# Altium PCB AX301_AX4010.PcbDoc (part 6 of 10)
Units mm, origin at the board's own origin, x right, y up, seen from the top; angles counter-clockwise.
Board outline 131.7 x 91.8 mm, 4 copper layers (Top Layer, GND, Mid-Layer 1, Bottom Layer); 191 components, 338 nets, 1108 pads, 420 vias.
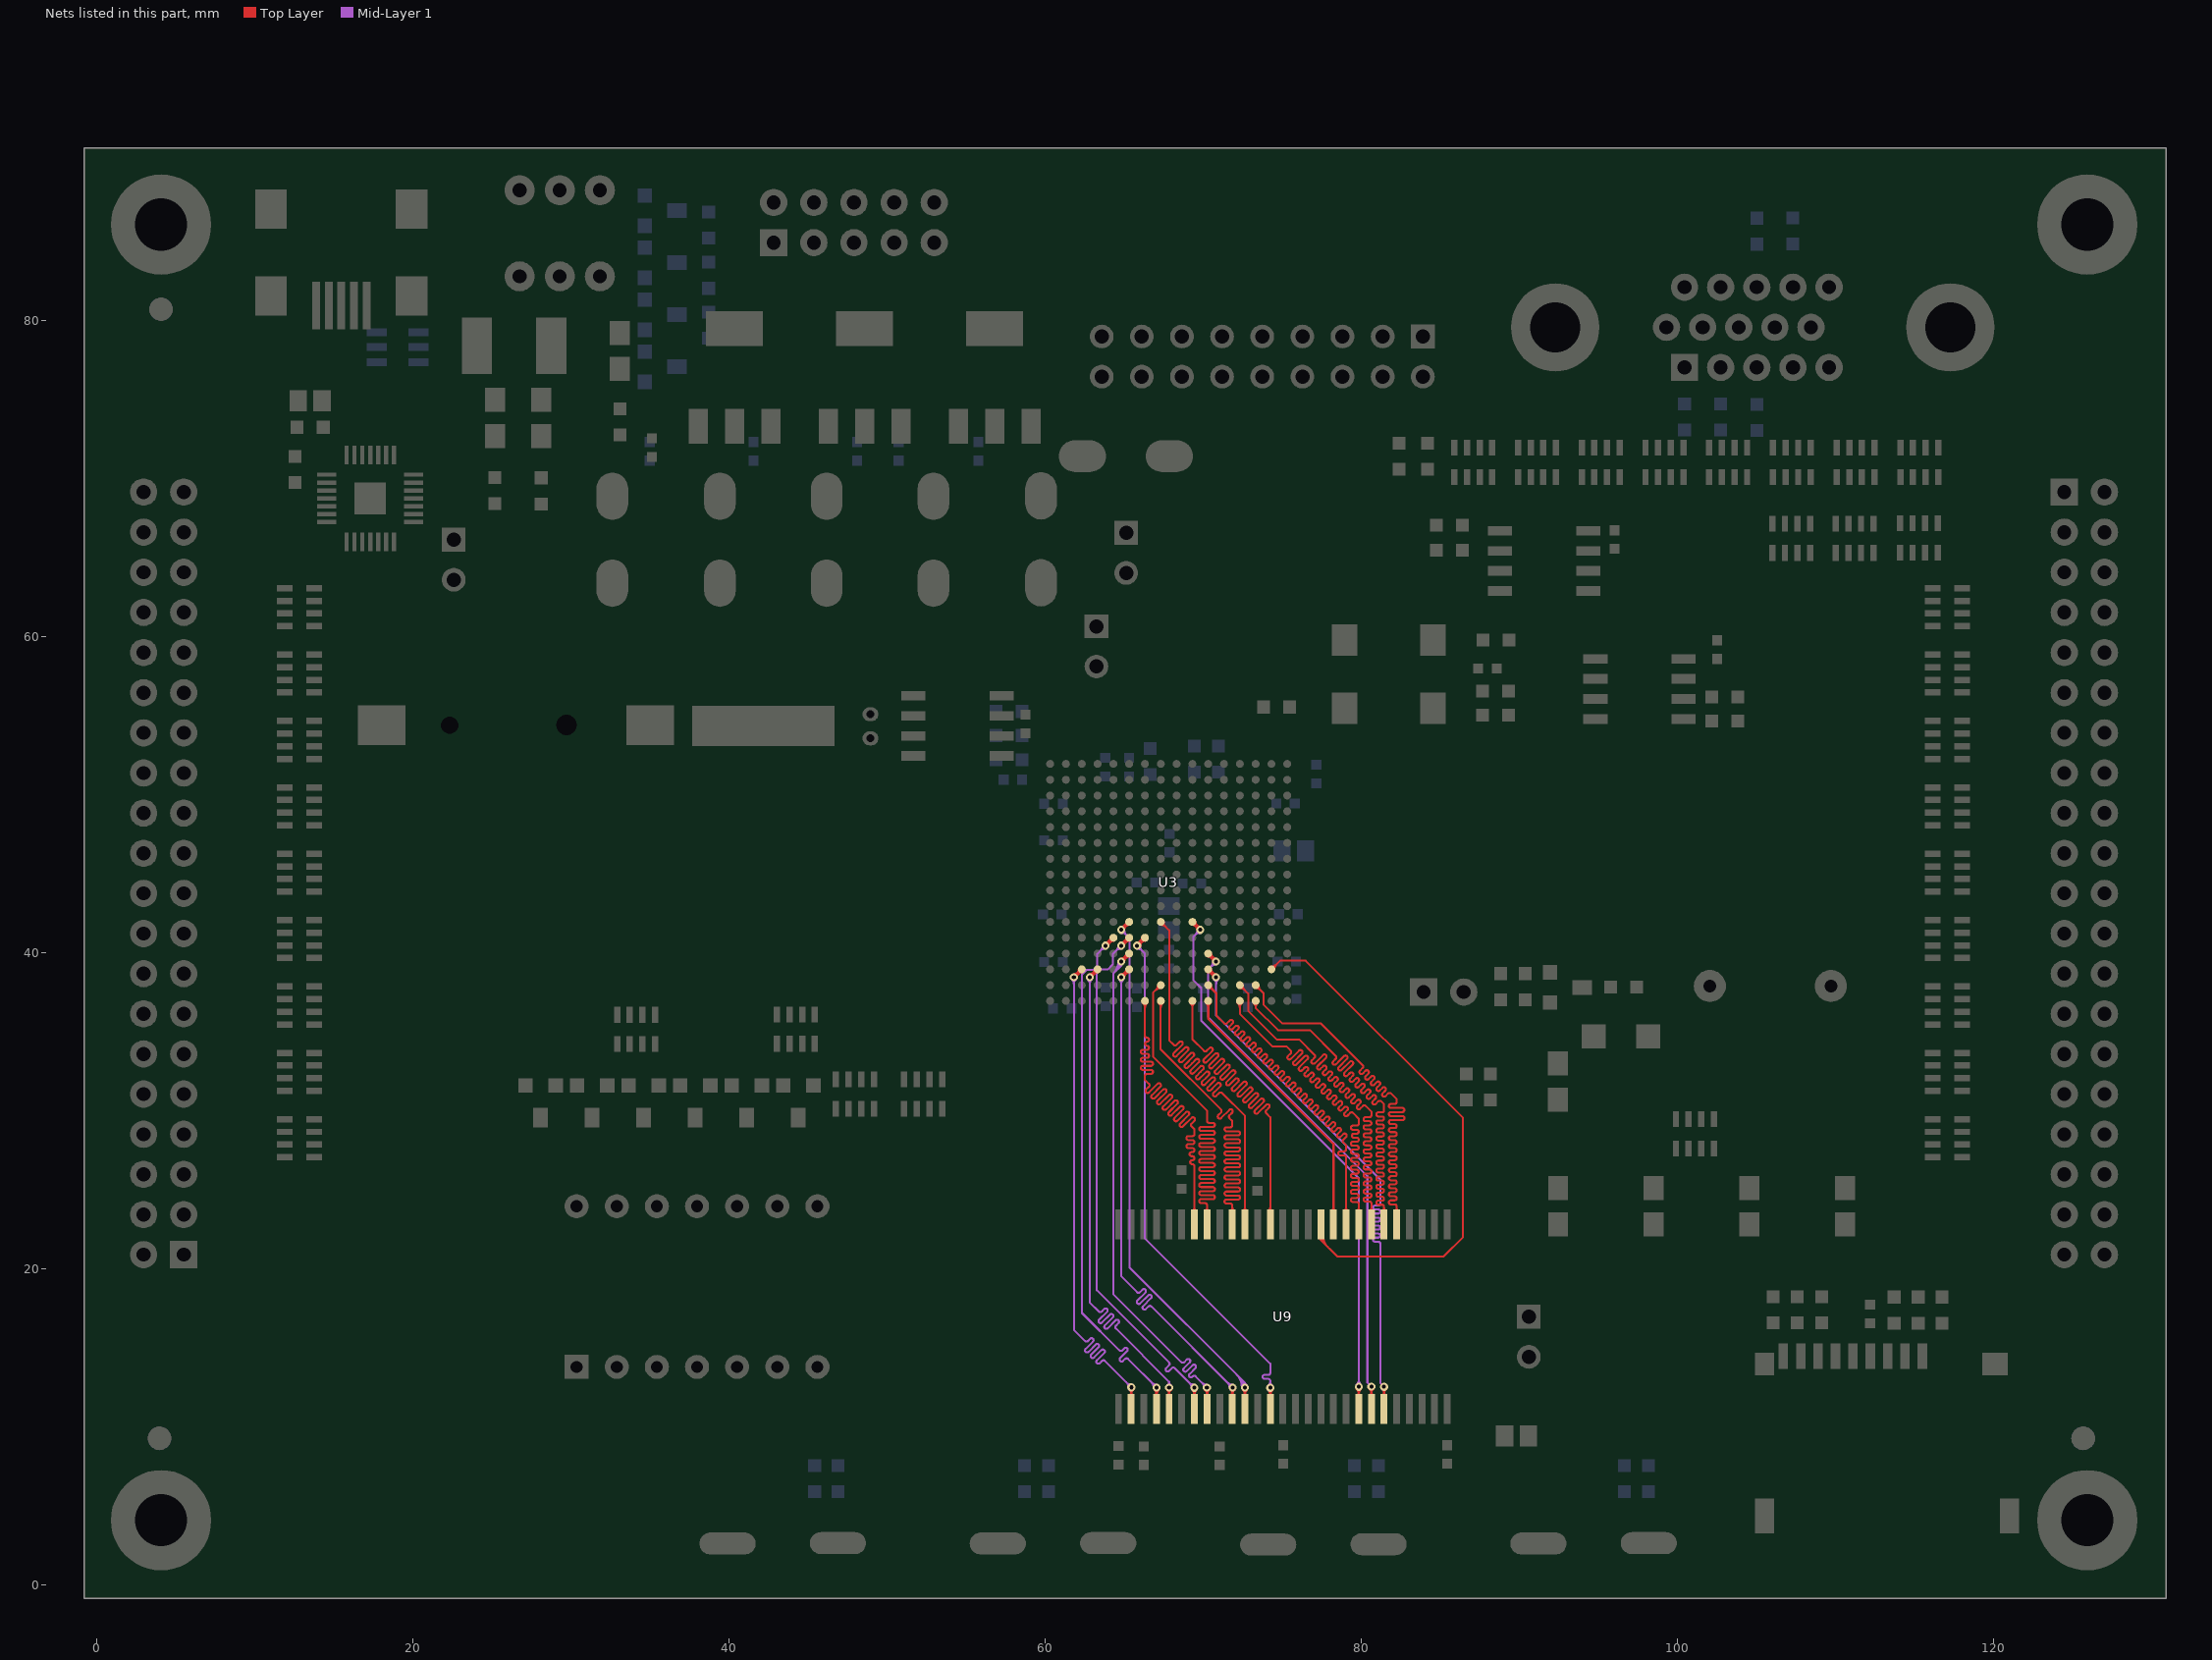
[diagram p8: the nets of this part, all layers, seen from the top]

## Via types
v1: diameter 0.508, hole 0.254, Top Layer to Bottom Layer, 377 vias
v2: diameter 0.762, hole 0.381, Top Layer to Bottom Layer, 41 vias
v3: diameter 1.016, hole 0.508, Top Layer to Bottom Layer, 2 vias

## Nets (pads, with @x,y where several pads share a name; then routed paths per layer and width w, separated by ;. In a path a pad name is that pad's centre, name@x,y a point inside that pad or via, vN(x,y) a via of type N, cw(c..) or ccw(c..) an arc to the next point about the centre after c; other vN are vias at no path point) (continued)
S_A7: U3.C15 U9.32 | length 37.3
  Top Layer w0.127: U3.C15@73.318,37.738 cw(c73.318,37.288) 73.636,37.606 cw(c73.955,37.925) U3.C15@73.504,37.925 ; U3.C15@73.318,37.925 73.812,37.43 73.812,36.703 75.019,35.496 77.457,35.496 80.088,32.866 cw(c79.998,32.776) 80.088,32.686 79.92,32.519 ccw(c80.01,32.429) 79.92,32.339 ccw(c80.01,32.429) 80.1,32.339 80.267,32.507 cw(c80.357,32.417) 80.447,32.507 cw(c80.357,32.417) 80.447,32.327 80.28,32.16 ccw(c80.369,32.07) 80.28,31.98 ccw(c80.369,32.07) 80.459,31.98 80.627,32.148 cw(c80.716,32.058) 80.806,32.148 cw(c80.716,32.058) 80.806,31.968 80.639,31.801 ccw(c80.729,31.711) 80.639,31.621 ccw(c80.729,31.711) 80.818,31.621 80.986,31.788 cw(c81.076,31.699) 81.165,31.788 cw(c81.076,31.699) 81.165,31.609 80.998,31.441 ccw(c81.088,31.352) 80.998,31.262 ccw(c81.088,31.352) 81.178,31.262 81.345,31.429 cw(c81.435,31.339) 81.525,31.429 cw(c81.435,31.339) 81.525,31.25 81.357,31.082 ccw(c81.447,30.992) 81.357,30.903 ccw(c81.447,30.992) 81.537,30.903 81.704,31.07 cw(c81.794,30.98) 81.884,31.07 82.243,30.711 82.243,30.531 cw(c82.116,30.531) 82.116,30.404 81.879,30.404 ccw(c81.879,30.277) 81.752,30.277 ccw(c81.879,30.277) 81.879,30.15 82.607,30.15 cw(c82.607,30.023) 82.734,30.023 cw(c82.607,30.023) 82.607,29.896 81.879,29.896 ccw(c81.879,29.769) 81.752,29.769 ccw(c81.879,29.769) 81.879,29.642 82.607,29.642 cw(c82.607,29.515) 82.734,29.515 cw(c82.607,29.515) 82.607,29.388 81.879,29.388 ccw(c81.879,29.261) 81.752,29.261 ccw(c81.879,29.261) 81.879,29.134 82.116,29.134 cw(c82.116,29.007) 82.243,29.007 cw(c82.116,29.007) 82.116,28.88 81.879,28.88 ccw(c81.879,28.753) 81.752,28.753 ccw(c81.879,28.753) 81.879,28.626 82.116,28.626 cw(c82.116,28.499) 82.243,28.499 cw(c82.116,28.499) 82.116,28.372 81.879,28.372 ccw(c81.879,28.245) 81.752,28.245 ccw(c81.879,28.245) 81.879,28.118 82.116,28.118 cw(c82.116,27.991) 82.243,27.991 cw(c82.116,27.991) 82.116,27.864 81.879,27.864 ccw(c81.879,27.737) 81.752,27.737 ccw(c81.879,27.737) 81.879,27.61 82.116,27.61 cw(c82.116,27.483) 82.243,27.483 cw(c82.116,27.483) 82.116,27.356 81.879,27.356 ccw(c81.879,27.229) 81.752,27.229 ccw(c81.879,27.229) 81.879,27.102 82.116,27.102 cw(c82.116,26.975) 82.243,26.975 cw(c82.116,26.975) 82.116,26.848 81.879,26.848 ccw(c81.879,26.721) 81.752,26.721 ccw(c81.879,26.721) 81.879,26.594 82.116,26.594 cw(c82.116,26.467) 82.243,26.467 cw(c82.116,26.467) 82.116,26.34 81.879,26.34 ccw(c81.879,26.213) 81.752,26.213 ccw(c81.879,26.213) 81.879,26.086 82.116,26.086 cw(c82.116,25.959) 82.243,25.959 cw(c82.116,25.959) 82.116,25.832 81.879,25.832 ccw(c81.879,25.705) 81.752,25.705 ccw(c81.879,25.705) 81.879,25.578 82.116,25.578 cw(c82.116,25.451) 82.243,25.451 cw(c82.116,25.451) 82.116,25.324 81.879,25.324 ccw(c81.879,25.197) 81.752,25.197 ccw(c81.879,25.197) 81.879,25.07 82.116,25.07 cw(c82.116,24.943) 82.243,24.943 cw(c82.116,24.943) 82.116,24.816 81.879,24.816 ccw(c81.879,24.689) 81.752,24.689 ccw(c81.879,24.689) 81.879,24.562 82.116,24.562 cw(c82.116,24.435) 82.243,24.435 cw(c82.116,24.435) 82.116,24.308 81.879,24.308 ccw(c81.879,24.181) 81.752,24.181 ccw(c81.879,24.181) 81.879,24.054 82.116,24.054 cw(c82.116,23.927) 82.243,23.927 U9.32@82.243,22.784 ; U9.32@82.135,23.628 ccw(c81.875,23.888) 82.243,23.888 ccw(c82.611,23.888) U9.32@82.351,23.628
S_A8: U3.C16 U9.33 | length 37.2
  Top Layer w0.127: U3.C16@73.189,36.79 cw(c72.896,36.486) 73.318,36.486 ; U3.C16@73.318,36.925 73.318,36.486 ; 73.32,36.484 74.727,35.077 76.759,35.077 78.39,33.446 cw(c78.3,33.357) 78.39,33.267 78.222,33.099 ccw(c78.311,33.009) 78.222,32.919 ccw(c78.311,33.009) 78.401,32.919 78.659,33.177 78.917,33.435 cw(c79.007,33.345) 79.097,33.435 cw(c79.007,33.345) 79.097,33.255 78.581,32.74 ccw(c78.671,32.65) 78.581,32.56 ccw(c78.671,32.65) 78.76,32.56 79.276,33.076 cw(c79.366,32.986) 79.456,33.076 cw(c79.366,32.986) 79.456,32.896 78.94,32.38 ccw(c79.03,32.291) 78.94,32.201 ccw(c79.03,32.291) 79.12,32.201 79.288,32.369 cw(c79.378,32.279) 79.467,32.369 cw(c79.378,32.279) 79.467,32.189 79.299,32.021 ccw(c79.389,31.931) 79.299,31.842 ccw(c79.389,31.931) 79.479,31.842 79.647,32.01 cw(c79.737,31.92) 79.827,32.01 cw(c79.737,31.92) 79.827,31.83 79.658,31.662 ccw(c79.748,31.572) 79.658,31.482 ccw(c79.748,31.572) 79.838,31.482 80.006,31.65 cw(c80.096,31.561) 80.186,31.65 cw(c80.096,31.561) 80.186,31.471 80.018,31.303 ccw(c80.107,31.213) 80.018,31.123 ccw(c80.107,31.213) 80.197,31.123 80.365,31.291 cw(c80.455,31.201) 80.545,31.291 cw(c80.455,31.201) 80.545,31.112 80.377,30.943 ccw(c80.467,30.854) 80.377,30.764 ccw(c80.467,30.854) 80.556,30.764 80.725,30.932 cw(c80.814,30.842) 80.904,30.932 cw(c80.814,30.842) 80.904,30.752 80.736,30.584 ccw(c80.826,30.494) 80.736,30.405 ccw(c80.826,30.494) 80.916,30.405 81.084,30.573 cw(c81.174,30.483) 81.263,30.573 81.443,30.393 81.443,29.997 cw(c81.316,29.997) 81.316,29.87 81.078,29.87 ccw(c81.078,29.743) 80.951,29.743 ccw(c81.078,29.743) 81.078,29.616 81.316,29.616 cw(c81.316,29.489) 81.443,29.489 cw(c81.316,29.489) 81.316,29.362 81.078,29.362 ccw(c81.078,29.235) 80.951,29.235 ccw(c81.078,29.235) 81.078,29.108 81.316,29.108 cw(c81.316,28.981) 81.443,28.981 cw(c81.316,28.981) 81.316,28.854 81.078,28.854 ccw(c81.078,28.727) 80.951,28.727 ccw(c81.078,28.727) 81.078,28.6 81.316,28.6 cw(c81.316,28.473) 81.443,28.473 cw(c81.316,28.473) 81.316,28.346 81.078,28.346 ccw(c81.078,28.219) 80.951,28.219 ccw(c81.078,28.219) 81.078,28.092 81.316,28.092 cw(c81.316,27.965) 81.443,27.965 cw(c81.316,27.965) 81.316,27.838 81.078,27.838 ccw(c81.078,27.711) 80.951,27.711 ccw(c81.078,27.711) 81.078,27.584 81.316,27.584 cw(c81.316,27.457) 81.443,27.457 cw(c81.316,27.457) 81.316,27.33 81.078,27.33 ccw(c81.078,27.203) 80.951,27.203 ccw(c81.078,27.203) 81.078,27.076 81.316,27.076 cw(c81.316,26.949) 81.443,26.949 cw(c81.316,26.949) 81.316,26.822 81.078,26.822 ccw(c81.078,26.695) 80.951,26.695 ccw(c81.078,26.695) 81.078,26.568 81.316,26.568 cw(c81.316,26.441) 81.443,26.441 cw(c81.316,26.441) 81.316,26.314 81.078,26.314 ccw(c81.078,26.187) 80.951,26.187 ccw(c81.078,26.187) 81.078,26.06 81.316,26.06 cw(c81.316,25.933) 81.443,25.933 cw(c81.316,25.933) 81.316,25.806 81.078,25.806 ccw(c81.078,25.679) 80.951,25.679 ccw(c81.078,25.679) 81.078,25.552 81.316,25.552 cw(c81.316,25.425) 81.443,25.425 cw(c81.316,25.425) 81.316,25.298 81.078,25.298 ccw(c81.078,25.171) 80.951,25.171 ccw(c81.078,25.171) 81.078,25.044 81.316,25.044 cw(c81.316,24.917) 81.443,24.917 cw(c81.316,24.917) 81.316,24.79 81.078,24.79 ccw(c81.078,24.663) 80.951,24.663 ccw(c81.078,24.663) 81.078,24.536 81.316,24.536 cw(c81.316,24.409) 81.443,24.409 cw(c81.316,24.409) 81.316,24.282 81.078,24.282 ccw(c81.078,24.155) 80.951,24.155 ccw(c81.078,24.155) 81.078,24.028 81.316,24.028 cw(c81.316,23.901) 81.443,23.901 U9.33@81.443,22.784 ; U3.C16@73.447,36.79 ccw(c73.74,36.486) 73.318,36.486 ; U9.33@81.335,23.628 ccw(c81.075,23.888) 81.443,23.888 ccw(c81.811,23.888) U9.33@81.551,23.628
S_A9: U3.D15 U9.34 | length 37.3
  Top Layer w0.127: U3.D15@72.318,37.738 cw(c72.318,37.288) 72.636,37.606 cw(c72.955,37.925) U3.D15@72.505,37.925 ; U3.D15@72.318,37.925 72.847,37.395 72.847,36.297 74.676,34.468 76.098,34.468 77.053,33.513 cw(c76.963,33.423) 77.053,33.334 76.88,33.161 ccw(c76.97,33.071) 76.88,32.982 ccw(c76.97,33.071) 77.06,32.982 77.585,33.506 cw(c77.674,33.416) 77.764,33.506 cw(c77.674,33.416) 77.764,33.327 77.24,32.802 ccw(c77.329,32.712) 77.24,32.622 ccw(c77.329,32.712) 77.419,32.622 77.592,32.795 cw(c77.682,32.705) 77.771,32.795 cw(c77.682,32.705) 77.771,32.615 77.599,32.443 ccw(c77.689,32.353) 77.599,32.263 ccw(c77.689,32.353) 77.779,32.263 77.951,32.436 cw(c78.041,32.346) 78.131,32.436 cw(c78.041,32.346) 78.131,32.256 77.958,32.084 ccw(c78.048,31.994) 77.958,31.904 ccw(c78.048,31.994) 78.138,31.904 78.31,32.076 cw(c78.4,31.987) 78.49,32.076 cw(c78.4,31.987) 78.49,31.897 78.317,31.724 ccw(c78.407,31.635) 78.317,31.545 ccw(c78.407,31.635) 78.497,31.545 78.669,31.717 cw(c78.759,31.627) 78.849,31.717 cw(c78.759,31.627) 78.849,31.538 78.677,31.365 ccw(c78.766,31.275) 78.677,31.186 ccw(c78.766,31.275) 78.856,31.186 79.029,31.358 cw(c79.118,31.268) 79.208,31.358 cw(c79.118,31.268) 79.208,31.178 79.036,31.006 ccw(c79.126,30.916) 79.036,30.826 ccw(c79.126,30.916) 79.215,30.826 79.388,30.999 cw(c79.478,30.909) 79.567,30.999 cw(c79.478,30.909) 79.567,30.819 79.395,30.647 ccw(c79.485,30.557) 79.395,30.467 ccw(c79.485,30.557) 79.575,30.467 79.747,30.64 cw(c79.837,30.55) 79.927,30.64 cw(c79.837,30.55) 79.927,30.46 79.754,30.288 ccw(c79.844,30.198) 79.754,30.108 ccw(c79.844,30.198) 79.934,30.108 80.106,30.28 cw(c80.196,30.191) 80.286,30.28 80.645,29.921 80.645,29.693 cw(c80.518,29.693) 80.518,29.566 80.274,29.566 ccw(c80.274,29.439) 80.147,29.439 ccw(c80.274,29.439) 80.274,29.312 80.518,29.312 cw(c80.518,29.185) 80.645,29.185 cw(c80.518,29.185) 80.518,29.058 80.274,29.058 ccw(c80.274,28.931) 80.147,28.931 ccw(c80.274,28.931) 80.274,28.804 80.518,28.804 cw(c80.518,28.677) 80.645,28.677 cw(c80.518,28.677) 80.518,28.55 80.274,28.55 ccw(c80.274,28.423) 80.147,28.423 ccw(c80.274,28.423) 80.274,28.296 80.518,28.296 cw(c80.518,28.169) 80.645,28.169 cw(c80.518,28.169) 80.518,28.042 80.274,28.042 ccw(c80.274,27.915) 80.147,27.915 ccw(c80.274,27.915) 80.274,27.788 80.518,27.788 cw(c80.518,27.661) 80.645,27.661 cw(c80.518,27.661) 80.518,27.534 80.274,27.534 ccw(c80.274,27.407) 80.147,27.407 ccw(c80.274,27.407) 80.274,27.28 80.518,27.28 cw(c80.518,27.153) 80.645,27.153 cw(c80.518,27.153) 80.518,27.026 80.274,27.026 ccw(c80.274,26.899) 80.147,26.899 ccw(c80.274,26.899) 80.274,26.772 80.518,26.772 cw(c80.518,26.645) 80.645,26.645 cw(c80.518,26.645) 80.518,26.518 80.274,26.518 ccw(c80.274,26.391) 80.147,26.391 ccw(c80.274,26.391) 80.274,26.264 80.518,26.264 cw(c80.518,26.137) 80.645,26.137 cw(c80.518,26.137) 80.518,26.01 80.274,26.01 ccw(c80.274,25.883) 80.147,25.883 ccw(c80.274,25.883) 80.274,25.756 80.518,25.756 cw(c80.518,25.629) 80.645,25.629 cw(c80.518,25.629) 80.518,25.502 80.274,25.502 ccw(c80.274,25.375) 80.147,25.375 ccw(c80.274,25.375) 80.274,25.248 80.518,25.248 cw(c80.518,25.121) 80.645,25.121 cw(c80.518,25.121) 80.518,24.994 80.274,24.994 ccw(c80.274,24.867) 80.147,24.867 ccw(c80.274,24.867) 80.274,24.74 80.518,24.74 cw(c80.518,24.613) 80.645,24.613 cw(c80.518,24.613) 80.518,24.486 80.274,24.486 ccw(c80.274,24.359) 80.147,24.359 ccw(c80.274,24.359) 80.274,24.232 80.518,24.232 cw(c80.518,24.105) 80.645,24.105 U9.34@80.645,22.784 ; U9.34@80.537,23.628 ccw(c80.277,23.888) 80.645,23.888 ccw(c81.013,23.888) U9.34@80.753,23.628
S_A10: U3.F14 U9.22 | length 38.9
  Top Layer w0.127: v1@81.308,12.373 cw(c80.983,12.047) 81.443,12.047 cw(c81.903,12.047) v1@81.578,12.373 ; U9.22@81.335,11.944 ccw(c81.075,12.204) 81.443,12.204 ccw(c81.811,12.204) U9.22@81.551,11.944 ; U9.22@81.443,11.1 v1(81.443,12.507)
  Top Layer w0.254: U3.F14@70.318,38.802 cw(c70.318,38.505) 70.528,38.715 cw(c70.738,38.925) U3.F14@70.441,38.925 ; U3.F14@70.318,38.925 v1(70.818,38.425) ; v1@70.691,38.425 ccw(c70.384,38.425) 70.601,38.641 ccw(c70.818,38.858) v1@70.818,38.552
  Mid-Layer 1 w0.127: v1@70.683,38.29 cw(c70.358,37.965) 70.818,37.965 cw(c71.278,37.965) v1@70.953,38.29 ; v1(70.818,38.425) 70.818,36.014 81.204,25.629 81.204,24.105 cw(c81.077,24.105) 81.077,23.978 80.868,23.978 ccw(c80.868,23.851) 80.741,23.851 ccw(c80.868,23.851) 80.868,23.724 81.077,23.724 cw(c81.077,23.597) 81.204,23.597 cw(c81.077,23.597) 81.077,23.47 80.868,23.47 ccw(c80.868,23.343) 80.741,23.343 ccw(c80.868,23.343) 80.868,23.216 81.077,23.216 cw(c81.077,23.089) 81.204,23.089 cw(c81.077,23.089) 81.077,22.962 80.868,22.962 ccw(c80.868,22.835) 80.741,22.835 ccw(c80.868,22.835) 80.868,22.708 81.077,22.708 cw(c81.077,22.581) 81.204,22.581 cw(c81.077,22.581) 81.077,22.454 80.868,22.454 ccw(c80.868,22.327) 80.741,22.327 ccw(c80.868,22.327) 80.868,22.2 81.077,22.2 cw(c81.077,22.073) 81.204,22.073 cw(c81.077,22.073) 81.077,21.946 80.868,21.946 ccw(c80.868,21.819) 80.741,21.819 ccw(c80.868,21.819) 80.868,21.692 81.077,21.692 cw(c81.077,21.565) 81.204,21.565 81.204,12.747 v1(81.443,12.507)
S_A11: U3.D16 U9.35 | length 37.3
  Top Layer w0.127: U3.D16@72.186,36.793 cw(c71.868,36.474) 72.318,36.474 cw(c72.768,36.474) U3.D16@72.45,36.793 ; U3.D16@72.318,36.925 72.318,36.115 74.397,34.036 75.286,34.036 75.532,33.789 cw(c75.443,33.699) 75.532,33.61 75.36,33.437 ccw(c75.45,33.347) 75.36,33.258 ccw(c75.45,33.347) 75.54,33.258 76.064,33.782 cw(c76.154,33.692) 76.244,33.782 cw(c76.154,33.692) 76.244,33.602 75.719,33.078 ccw(c75.809,32.988) 75.719,32.898 ccw(c75.809,32.988) 75.899,32.898 76.423,33.423 cw(c76.513,33.333) 76.603,33.423 cw(c76.513,33.333) 76.603,33.243 76.079,32.719 ccw(c76.168,32.629) 76.079,32.539 ccw(c76.168,32.629) 76.258,32.539 76.431,32.711 cw(c76.52,32.622) 76.61,32.711 cw(c76.52,32.622) 76.61,32.532 76.438,32.36 ccw(c76.528,32.27) 76.438,32.18 ccw(c76.528,32.27) 76.617,32.18 76.79,32.352 cw(c76.88,32.262) 76.969,32.352 cw(c76.88,32.262) 76.969,32.173 76.797,32 ccw(c76.887,31.911) 76.797,31.821 ccw(c76.887,31.911) 76.977,31.821 77.149,31.993 cw(c77.239,31.903) 77.329,31.993 cw(c77.239,31.903) 77.329,31.813 77.156,31.641 ccw(c77.246,31.551) 77.156,31.462 ccw(c77.246,31.551) 77.336,31.462 77.508,31.634 cw(c77.598,31.544) 77.688,31.634 cw(c77.598,31.544) 77.688,31.454 77.515,31.282 ccw(c77.605,31.192) 77.515,31.102 ccw(c77.605,31.192) 77.695,31.102 77.867,31.275 cw(c77.957,31.185) 78.047,31.275 cw(c77.957,31.185) 78.047,31.095 77.875,30.923 ccw(c77.964,30.833) 77.875,30.743 ccw(c77.964,30.833) 78.054,30.743 78.227,30.915 cw(c78.316,30.826) 78.406,30.915 cw(c78.316,30.826) 78.406,30.736 78.234,30.564 ccw(c78.324,30.474) 78.234,30.384 ccw(c78.324,30.474) 78.413,30.384 78.586,30.556 cw(c78.676,30.466) 78.765,30.556 cw(c78.676,30.466) 78.765,30.377 78.593,30.204 ccw(c78.683,30.115) 78.593,30.025 ccw(c78.683,30.115) 78.773,30.025 78.945,30.197 cw(c79.035,30.107) 79.125,30.197 cw(c79.035,30.107) 79.125,30.017 78.952,29.845 ccw(c79.042,29.755) 78.952,29.665 ccw(c79.042,29.755) 79.132,29.665 79.304,29.838 cw(c79.394,29.748) 79.484,29.838 79.843,29.479 79.843,29.159 cw(c79.716,29.159) 79.716,29.032 79.472,29.032 ccw(c79.472,28.905) 79.345,28.905 ccw(c79.472,28.905) 79.472,28.778 79.716,28.778 cw(c79.716,28.651) 79.843,28.651 cw(c79.716,28.651) 79.716,28.524 79.533,28.524 ccw(c79.533,28.397) 79.406,28.397 ccw(c79.533,28.397) 79.533,28.27 79.716,28.27 cw(c79.716,28.143) 79.843,28.143 cw(c79.716,28.143) 79.716,28.016 79.472,28.016 ccw(c79.472,27.889) 79.345,27.889 ccw(c79.472,27.889) 79.472,27.762 79.716,27.762 cw(c79.716,27.635) 79.843,27.635 cw(c79.716,27.635) 79.716,27.508 79.472,27.508 ccw(c79.472,27.381) 79.345,27.381 ccw(c79.472,27.381) 79.472,27.254 79.716,27.254 cw(c79.716,27.127) 79.843,27.127 cw(c79.716,27.127) 79.716,27 79.472,27 ccw(c79.472,26.873) 79.345,26.873 ccw(c79.472,26.873) 79.472,26.746 79.716,26.746 cw(c79.716,26.619) 79.843,26.619 cw(c79.716,26.619) 79.716,26.492 79.472,26.492 ccw(c79.472,26.365) 79.345,26.365 ccw(c79.472,26.365) 79.472,26.238 79.716,26.238 cw(c79.716,26.111) 79.843,26.111 cw(c79.716,26.111) 79.716,25.984 79.472,25.984 ccw(c79.472,25.857) 79.345,25.857 ccw(c79.472,25.857) 79.472,25.73 79.716,25.73 cw(c79.716,25.603) 79.843,25.603 cw(c79.716,25.603) 79.716,25.476 79.472,25.476 ccw(c79.472,25.349) 79.345,25.349 ccw(c79.472,25.349) 79.472,25.222 79.716,25.222 cw(c79.716,25.095) 79.843,25.095 cw(c79.716,25.095) 79.716,24.968 79.472,24.968 ccw(c79.472,24.841) 79.345,24.841 ccw(c79.472,24.841) 79.472,24.714 79.716,24.714 cw(c79.716,24.587) 79.843,24.587 cw(c79.716,24.587) 79.716,24.46 79.472,24.46 ccw(c79.472,24.333) 79.345,24.333 ccw(c79.472,24.333) 79.472,24.206 79.716,24.206 cw(c79.716,24.079) 79.843,24.079 U9.35@79.843,22.784 ; U9.35@79.735,23.628 ccw(c79.475,23.888) 79.843,23.888 ccw(c80.211,23.888) U9.35@79.951,23.628
S_A12: U3.F15 U9.36 | length 37.3
  Top Layer w0.127: U3.F15@70.318,37.738 cw(c70.318,37.288) 70.636,37.606 cw(c70.955,37.925) U3.F15@70.504,37.925 ; U3.F15@70.318,37.925 70.841,37.402 70.841,35.992 71.323,35.509 ccw(c71.413,35.599) 71.503,35.509 71.677,35.683 cw(c71.767,35.594) 71.857,35.683 cw(c71.767,35.594) 71.857,35.504 71.682,35.33 ccw(c71.772,35.24) 71.682,35.15 ccw(c71.772,35.24) 71.862,35.15 72.036,35.324 cw(c72.126,35.234) 72.216,35.324 cw(c72.126,35.234) 72.216,35.145 72.042,34.97 ccw(c72.131,34.881) 72.042,34.791 ccw(c72.131,34.881) 72.221,34.791 72.395,34.965 cw(c72.485,34.875) 72.575,34.965 cw(c72.485,34.875) 72.575,34.785 72.401,34.611 ccw(c72.491,34.521) 72.401,34.432 ccw(c72.491,34.521) 72.58,34.432 72.755,34.606 cw(c72.844,34.516) 72.934,34.606 cw(c72.844,34.516) 72.934,34.426 72.76,34.252 ccw(c72.85,34.162) 72.76,34.072 ccw(c72.85,34.162) 72.94,34.072 73.114,34.247 cw(c73.204,34.157) 73.293,34.247 cw(c73.204,34.157) 73.293,34.067 73.119,33.893 ccw(c73.209,33.803) 73.119,33.713 ccw(c73.209,33.803) 73.299,33.713 73.473,33.887 cw(c73.563,33.798) 73.653,33.887 cw(c73.563,33.798) 73.653,33.708 73.478,33.534 ccw(c73.568,33.444) 73.478,33.354 ccw(c73.568,33.444) 73.658,33.354 73.832,33.528 cw(c73.922,33.438) 74.012,33.528 cw(c73.922,33.438) 74.012,33.348 73.838,33.174 ccw(c73.927,33.085) 73.838,32.995 ccw(c73.927,33.085) 74.017,32.995 74.191,33.169 cw(c74.281,33.079) 74.371,33.169 cw(c74.281,33.079) 74.371,32.989 74.197,32.815 ccw(c74.287,32.725) 74.197,32.636 ccw(c74.287,32.725) 74.376,32.636 74.551,32.81 cw(c74.64,32.72) 74.73,32.81 cw(c74.64,32.72) 74.73,32.63 74.556,32.456 ccw(c74.646,32.366) 74.556,32.276 ccw(c74.646,32.366) 74.736,32.276 74.91,32.45 cw(c75,32.361) 75.089,32.45 cw(c75,32.361) 75.089,32.271 74.915,32.097 ccw(c75.005,32.007) 74.915,31.917 ccw(c75.005,32.007) 75.095,31.917 75.269,32.091 cw(c75.359,32.001) 75.449,32.091 cw(c75.359,32.001) 75.449,31.912 75.275,31.737 ccw(c75.364,31.648) 75.275,31.558 ccw(c75.364,31.648) 75.454,31.558 75.628,31.732 cw(c75.718,31.642) 75.808,31.732 cw(c75.718,31.642) 75.808,31.552 75.634,31.378 ccw(c75.724,31.288) 75.634,31.199 ccw(c75.724,31.288) 75.813,31.199 75.987,31.373 cw(c76.077,31.283) 76.167,31.373 cw(c76.077,31.283) 76.167,31.193 75.993,31.019 ccw(c76.083,30.929) 75.993,30.839 ccw(c76.083,30.929) 76.173,30.839 76.347,31.014 cw(c76.437,30.924) 76.526,31.014 cw(c76.437,30.924) 76.526,30.834 76.352,30.66 ccw(c76.442,30.57) 76.352,30.48 ccw(c76.442,30.57) 76.532,30.48 76.706,30.654 cw(c76.796,30.565) 76.886,30.654 cw(c76.796,30.565) 76.886,30.475 76.711,30.301 ccw(c76.801,30.211) 76.711,30.121 ccw(c76.801,30.211) 76.891,30.121 77.065,30.295 cw(c77.155,30.205) 77.245,30.295 cw(c77.155,30.205) 77.245,30.116 77.071,29.941 ccw(c77.16,29.852) 77.071,29.762 ccw(c77.16,29.852) 77.25,29.762 77.424,29.936 cw(c77.514,29.846) 77.604,29.936 cw(c77.514,29.846) 77.604,29.756 77.43,29.582 ccw(c77.52,29.492) 77.43,29.403 ccw(c77.52,29.492) 77.609,29.403 77.784,29.577 cw(c77.873,29.487) 77.963,29.577 cw(c77.873,29.487) 77.963,29.397 77.789,29.223 ccw(c77.879,29.133) 77.789,29.043 ccw(c77.879,29.133) 77.969,29.043 78.143,29.218 cw(c78.233,29.128) 78.322,29.218 cw(c78.233,29.128) 78.322,29.038 78.148,28.864 ccw(c78.238,28.774) 78.148,28.684 ccw(c78.238,28.774) 78.328,28.684 78.502,28.858 cw(c78.592,28.769) 78.682,28.858 cw(c78.592,28.769) 78.682,28.679 78.507,28.505 ccw(c78.597,28.415) 78.507,28.325 ccw(c78.597,28.415) 78.687,28.325 78.861,28.499 cw(c78.951,28.409) 79.041,28.499 cw(c78.951,28.409) 79.041,28.32 78.867,28.145 ccw(c78.956,28.056) 78.867,27.966 79.043,27.789 79.043,27.535 cw(c78.916,27.535) 78.916,27.408 78.67,27.408 ccw(c78.67,27.281) 78.543,27.281 ccw(c78.67,27.281) 78.67,27.154 78.916,27.154 cw(c78.916,27.027) 79.043,27.027 U9.36@79.043,22.784 ; U9.36@78.935,23.628 ccw(c78.675,23.888) 79.043,23.888 ccw(c79.411,23.888) U9.36@79.151,23.628
S_BA0: U3.G11 U9.20 | length 39.3
  Top Layer w0.127: v1@79.708,12.373 cw(c79.383,12.048) 79.843,12.048 cw(c80.303,12.048) v1@79.978,12.373 ; U9.20@79.735,11.944 ccw(c79.475,12.204) 79.843,12.204 ccw(c80.211,12.204) U9.20@79.951,11.944 ; U9.20@79.843,11.1 v1(79.843,12.508)
  Top Layer w0.254: U3.G11@69.318,41.802 cw(c69.318,41.505) 69.528,41.715 cw(c69.738,41.925) U3.G11@69.441,41.925 ; U3.G11@69.318,41.925 v1(69.818,41.425) ; v1@69.691,41.425 ccw(c69.384,41.425) 69.601,41.641 ccw(c69.818,41.858) v1@69.818,41.552
  Mid-Layer 1 w0.127: v1@69.628,41.425 cw(c69.168,41.425) 69.493,41.099 cw(c69.818,40.774) v1@69.818,41.234 ; v1(69.818,41.425) 69.367,40.974 69.367,38.247 69.875,37.739 69.875,35.687 79.843,25.719 v1(79.843,12.508) ; v1@79.708,12.642 ccw(c79.383,12.968) 79.843,12.968 ccw(c80.303,12.968) v1@79.978,12.642
S_BA1: U3.F13 U9.21 | length 36.5
  Top Layer w0.127: v1@80.508,12.385 cw(c80.183,12.06) 80.643,12.06 cw(c81.103,12.06) v1@80.778,12.385 ; U9.21@80.535,11.944 ccw(c80.275,12.204) 80.643,12.204 ccw(c81.011,12.204) U9.21@80.751,11.944 ; U9.21@80.643,11.1 v1(80.643,12.52)
  Top Layer w0.254: U3.F13@70.318,39.802 cw(c70.318,39.505) 70.528,39.715 cw(c70.738,39.925) U3.F13@70.441,39.925 ; U3.F13@70.318,39.925 v1(70.818,39.425) ; v1@70.691,39.425 ccw(c70.384,39.425) 70.601,39.641 ccw(c70.818,39.858) v1@70.818,39.552
  Mid-Layer 1 w0.127: v1@70.628,39.425 cw(c70.168,39.425) 70.493,39.099 cw(c70.818,38.774) v1@70.818,39.234 ; v1(70.818,39.425) 70.307,38.914 70.307,35.916 80.391,25.832 80.391,12.772 v1(80.643,12.52)
S_CKE: U3.F16 U9.37 | length 18.6
  Top Layer w0.152: U3.F16@70.195,36.802 cw(c69.898,36.505) 70.318,36.505 cw(c70.738,36.505) U3.F16@70.441,36.802 ; U3.F16@70.318,36.925 70.318,35.803 78.243,27.878 U9.37@78.243,22.784 ; U9.37@78.144,23.619 ccw(c77.906,23.858) 78.243,23.858 ccw(c78.58,23.858) U9.37@78.342,23.619
S_CLK: U3.B14 U9.38 | length 37.5
  Top Layer w0.127: U3.B14@74.318,38.925 74.865,39.472 76.479,39.472 86.436,29.515 86.436,21.971 85.217,20.752 78.486,20.752 77.443,21.795 ; U3.B14@74.318,39.111 ccw(c74.318,39.561) 74.636,39.243 ccw(c74.955,38.925) U3.B14@74.504,38.925 ; U9.38@77.341,22.047 ccw(c77.705,22.047) 77.448,21.79 ; U9.38@77.372,21.912 cw(c77.31,21.795) 77.443,21.795 ; U9.38@77.443,22.784 77.443,21.795 ; U9.38@77.468,22.047 ccw(c78.139,22.047) 77.665,21.573 ; U9.38@77.514,21.912 ccw(c77.576,21.795) 77.443,21.795 ; U9.38@77.595,22.047 ccw(c78.573,22.047) 77.882,21.356
S_DB0: U3.P14 U9.2 | length 38
  Top Layer w0.127: v1@65.321,12.337 cw(c65.027,12.042) U9.2@65.443,12.042 ; U9.2@65.335,11.944 ccw(c65.075,12.204) 65.443,12.204 ccw(c65.811,12.204) U9.2@65.551,11.944 ; U9.2@65.443,11.1 65.443,12.459 v1(65.456,12.471) ; U9.2@65.443,11.981 cw(c65.947,11.981) v1@65.591,12.337
  Top Layer w0.254: v1(61.818,38.425) U3.P14@62.318,38.925 ; v1@61.818,38.552 ccw(c61.818,38.858) 62.035,38.641 ccw(c62.252,38.425) v1@61.945,38.425 ; U3.P14@62.195,38.925 cw(c61.898,38.925) 62.108,38.715 cw(c62.318,38.505) U3.P14@62.318,38.802
  Mid-Layer 1 w0.127: v1@61.683,38.29 cw(c61.358,37.965) 61.818,37.965 cw(c62.278,37.965) v1@61.953,38.29 ; v1(61.818,38.425) 61.818,16.109 62.522,15.405 ccw(c62.612,15.495) 62.702,15.405 62.846,15.549 cw(c62.936,15.459) 63.025,15.549 cw(c62.936,15.459) 63.025,15.37 62.558,14.902 ccw(c62.647,14.812) 62.558,14.722 ccw(c62.647,14.812) 62.737,14.722 63.205,15.19 cw(c63.295,15.1) 63.385,15.19 cw(c63.295,15.1) 63.385,15.01 62.917,14.543 ccw(c63.007,14.453) 62.917,14.363 ccw(c63.007,14.453) 63.096,14.363 63.564,14.831 cw(c63.654,14.741) 63.744,14.831 cw(c63.654,14.741) 63.744,14.651 63.276,14.183 ccw(c63.366,14.094) 63.276,14.004 ccw(c63.366,14.094) 63.456,14.004 63.6,14.148 cw(c63.69,14.058) 63.779,14.148 v1(65.456,12.471) ; v1@65.265,12.471 ccw(c64.805,12.471) 65.131,12.797 ccw(c65.456,13.122) v1@65.456,12.662
S_DB1: U3.M12 U9.4 | length 38.7
  Top Layer w0.127: v1@66.921,12.321 cw(c66.627,12.028) U9.4@67.043,12.028 ; U9.4@66.935,11.944 ccw(c66.675,12.204) 67.043,12.204 ccw(c67.411,12.204) U9.4@67.151,11.944 ; v1@66.947,12.3 cw(c66.846,12.154) 67.017,12.108 ; v1@66.961,12.291 cw(c66.864,12.123) 67.051,12.173 ; 67.021,12.121 cw(c67.291,12.049) v1@67.151,12.291 ; U9.4@67.043,11.1 67.043,12.443 v1(67.056,12.456) ; U9.4@67.043,11.965 cw(c67.547,11.965) v1@67.191,12.321 ; 67.057,12.15 cw(c67.16,12.178) v1@67.123,12.278
  Top Layer w0.254: v1(63.818,40.425) U3.M12@64.318,40.925 ; v1@63.818,40.552 ccw(c63.818,40.858) 64.035,40.641 ccw(c64.252,40.425) v1@63.945,40.425 ; U3.M12@64.195,40.925 cw(c63.898,40.925) 64.108,40.715 cw(c64.318,40.505) U3.M12@64.318,40.802
  Mid-Layer 1 w0.127: v1@63.627,40.425 cw(c63.168,40.425) 63.493,40.099 cw(c63.818,39.774) v1@63.818,40.234 ; v1(63.818,40.425) 63.297,39.903 63.297,39.167 63.017,38.887 62.611,38.887 62.332,38.608 62.332,17.181 64.699,14.813 ccw(c64.789,14.903) 64.879,14.813 65.009,14.944 cw(c65.099,14.854) 65.188,14.944 cw(c65.099,14.854) 65.188,14.764 64.748,14.324 ccw(c64.838,14.234) 64.748,14.144 ccw(c64.838,14.234) 64.928,14.144 65.058,14.274 cw(c65.148,14.185) 65.238,14.274 v1(67.056,12.456) ; v1@66.865,12.456 ccw(c66.406,12.456) 66.731,12.781 ccw(c67.056,13.107) v1@67.056,12.647
S_DB2: U3.N14 U9.5 | length 38.5
  Top Layer w0.127: v1@67.708,12.321 cw(c67.383,11.996) 67.843,11.996 cw(c68.303,11.996) v1@67.978,12.321 ; U9.5@67.735,11.944 ccw(c67.475,12.204) 67.843,12.204 ccw(c68.211,12.204) U9.5@67.951,11.944 ; v1@67.748,12.291 cw(c67.629,12.085) 67.858,12.147 ; v1@67.754,12.287 cw(c67.689,12.165) 67.823,12.129 ; 67.828,12.147 cw(c68.057,12.085) v1@67.938,12.291 ; U9.5@67.843,11.1 v1(67.843,12.456) ; 67.863,12.129 cw(c67.997,12.165) v1@67.932,12.287
  Top Layer w0.254: v1(62.818,38.425) U3.N14@63.318,38.925 ; v1@62.818,38.552 ccw(c62.818,38.858) 63.035,38.641 ccw(c63.252,38.425) v1@62.945,38.425 ; U3.N14@63.195,38.925 cw(c62.898,38.925) 63.108,38.715 cw(c63.318,38.505) U3.N14@63.318,38.802
  Mid-Layer 1 w0.127: v1@62.683,38.29 cw(c62.358,37.965) 62.818,37.965 cw(c63.278,37.965) v1@62.953,38.29 ; v1(62.818,38.425) 62.818,17.852 63.398,17.272 ccw(c63.488,17.362) 63.578,17.272 63.739,17.433 cw(c63.829,17.343) 63.918,17.433 cw(c63.829,17.343) 63.918,17.253 63.417,16.752 ccw(c63.507,16.662) 63.417,16.572 ccw(c63.507,16.662) 63.597,16.572 64.098,17.074 cw(c64.188,16.984) 64.278,17.074 cw(c64.188,16.984) 64.278,16.894 63.776,16.393 ccw(c63.866,16.303) 63.776,16.213 ccw(c63.866,16.303) 63.956,16.213 64.457,16.714 cw(c64.547,16.625) 64.637,16.714 cw(c64.547,16.625) 64.637,16.535 64.476,16.374 ccw(c64.566,16.284) 64.476,16.194 67.843,12.827 ; v1@67.732,12.61 ccw(c67.576,12.827) 67.843,12.827 ; v1(67.843,12.456) 67.843,12.827 ; v1@67.954,12.61 cw(c68.11,12.827) 67.843,12.827
S_DB3: U3.L12 U9.7 | length 38.7
  Top Layer w0.127: v1@69.309,12.311 cw(c68.985,11.988) U9.7@69.443,11.988 ; U9.7@69.335,11.944 ccw(c69.075,12.204) 69.443,12.204 ccw(c69.811,12.204) U9.7@69.551,11.944 ; v1@69.348,12.281 cw(c69.226,12.069) 69.462,12.133 ; v1@69.355,12.278 cw(c69.292,12.159) 69.421,12.124 ; 69.423,12.13 cw(c69.663,12.066) v1@69.539,12.281 ; U9.7@69.443,11.1 v1(69.444,12.446) ; U9.7@69.443,11.985 cw(c69.905,11.985) v1@69.578,12.311 ; 69.464,12.126 cw(c69.591,12.16) v1@69.531,12.277
  Top Layer w0.254: v1(64.818,40.425) U3.L12@65.318,40.925 ; v1@64.818,40.552 ccw(c64.818,40.858) 65.035,40.641 ccw(c65.252,40.425) v1@64.945,40.425 ; U3.L12@65.195,40.925 cw(c64.898,40.925) 65.108,40.715 cw(c65.318,40.505) U3.L12@65.318,40.802
  Mid-Layer 1 w0.127: v1@64.627,40.425 cw(c64.168,40.425) 64.493,40.099 cw(c64.818,39.774) v1@64.818,40.234 ; v1(64.818,40.425) 64.287,39.894 64.287,39.243 63.957,38.913 63.525,38.913 63.271,38.659 63.271,18.618 67.84,14.05 cw(c67.75,13.96) 67.84,13.87 67.663,13.693 ccw(c67.752,13.603) 67.663,13.513 ccw(c67.752,13.603) 67.842,13.513 68.019,13.691 cw(c68.109,13.601) 68.199,13.691 v1(69.444,12.446) ; v1@69.253,12.446 ccw(c68.793,12.446) 69.118,12.771 ccw(c69.444,13.096) v1@69.444,12.636
S_DB4: U3.L13 U9.8 | length 39.2
  Top Layer w0.152: v1@70.105,12.33 cw(c69.773,11.998) U9.8@70.243,11.998 ; U9.8@70.144,11.935 ccw(c69.906,12.174) 70.243,12.174 ccw(c70.58,12.174) U9.8@70.342,11.935 ; v1(70.231,12.456) 70.243,12.444 U9.8@70.243,11.1 ; 70.243,12.056 cw(c70.631,12.056) v1@70.357,12.33
  Top Layer w0.254: v1(64.818,39.425) U3.L13@65.318,39.925 ; v1@64.818,39.552 ccw(c64.818,39.858) 65.035,39.641 ccw(c65.252,39.425) v1@64.945,39.425 ; U3.L13@65.195,39.925 cw(c64.898,39.925) 65.108,39.715 cw(c65.318,39.505) U3.L13@65.318,39.802
  Mid-Layer 1 w0.127: 64.528,38.874 ccw(c63.982,39.421) v1@64.754,39.424 ; v1@64.627,39.424 cw(c63.553,39.418) 64.313,38.659 ; 64.744,39.089 ccw(c64.41,39.423) v1@64.881,39.425 ; v1@64.76,39.243 cw(c64.735,39.164) 64.818,39.164 ; v1(64.818,39.425) 64.818,39.164 ; v1@64.876,39.243 ccw(c64.901,39.164) 64.818,39.164 ; v1@70.04,12.456 ccw(c69.581,12.456) 69.906,12.781 ccw(c70.231,13.107) v1@70.231,12.647 ; v1(70.231,12.456) 69.52,13.167 ccw(c69.43,13.078) 69.34,13.167 69.314,13.141 cw(c69.224,13.231) 69.134,13.141 cw(c69.224,13.231) 69.134,13.321 69.506,13.693 ccw(c69.417,13.783) 69.506,13.872 ccw(c69.417,13.783) 69.327,13.872 68.955,13.5 cw(c68.865,13.59) 68.775,13.5 cw(c68.865,13.59) 68.775,13.68 69.147,14.052 ccw(c69.057,14.142) 69.147,14.232 ccw(c69.057,14.142) 68.968,14.232 68.801,14.065 cw(c68.712,14.155) 68.622,14.065 64.313,18.374 64.313,38.659 ; 64.313,38.659 64.818,39.164
S_DB5: U3.L14 U9.10 | length 38.7
  Top Layer w0.127: v1@71.722,12.321 cw(c71.43,12.029) U9.10@71.843,12.029 ; U9.10@71.735,11.944 ccw(c71.475,12.204) 71.843,12.204 ccw(c72.211,12.204) U9.10@71.951,11.944 ; v1@71.747,12.3 cw(c71.644,12.154) 71.817,12.107 ; v1@71.761,12.291 cw(c71.665,12.125) 71.851,12.174 ; 71.82,12.12 cw(c72.093,12.047) v1@71.952,12.291 ; U9.10@71.843,11.1 71.843,12.443 v1(71.857,12.456) ; U9.10@71.843,11.963 cw(c72.349,11.963) v1@71.991,12.321 ; 71.857,12.151 cw(c71.959,12.179) v1@71.922,12.277
  Top Layer w0.254: v1(64.818,38.425) U3.L14@65.318,38.925 ; v1@64.818,38.552 ccw(c64.818,38.858) 65.035,38.641 ccw(c65.252,38.425) v1@64.945,38.425 ; U3.L14@65.195,38.925 cw(c64.898,38.925) 65.108,38.715 cw(c65.318,38.505) U3.L14@65.318,38.802
  Mid-Layer 1 w0.127: v1@64.683,38.29 cw(c64.358,37.965) 64.818,37.965 cw(c65.278,37.965) v1@64.953,38.29 ; v1(64.818,38.425) 64.818,19.495 65.822,18.491 ccw(c65.911,18.581) 66.001,18.491 66.163,18.653 cw(c66.253,18.563) 66.343,18.653 cw(c66.253,18.563) 66.343,18.474 65.839,17.97 ccw(c65.929,17.88) 65.839,17.79 ccw(c65.929,17.88) 66.019,17.79 66.522,18.294 cw(c66.612,18.204) 66.702,18.294 cw(c66.612,18.204) 66.702,18.114 66.198,17.611 ccw(c66.288,17.521) 66.198,17.431 ccw(c66.288,17.521) 66.378,17.431 66.54,17.593 cw(c66.63,17.503) 66.72,17.593 v1(71.857,12.456) ; v1@71.666,12.456 ccw(c71.206,12.456) 71.531,12.781 ccw(c71.857,13.107) v1@71.857,12.647
S_DB6: U3.L11 U9.11 | length 40.3
  Top Layer w0.127: v1@72.509,12.321 cw(c72.185,11.997) 72.644,11.997 cw(c73.104,11.996) v1@72.779,12.321 ; U9.11@72.536,11.944 ccw(c72.276,12.204) 72.644,12.204 ccw(c73.012,12.204) U9.11@72.752,11.944 ; v1@72.549,12.291 cw(c72.43,12.086) 72.659,12.148 ; v1@72.555,12.288 cw(c72.489,12.165) 72.624,12.129 ; 72.628,12.147 cw(c72.858,12.085) v1@72.739,12.291 ; U9.11@72.644,11.1 v1(72.644,12.456) ; 72.664,12.13 cw(c72.797,12.166) v1@72.733,12.288
  Top Layer w0.254: v1(64.818,41.425) U3.L11@65.318,41.925 ; v1@64.818,41.552 ccw(c64.818,41.858) 65.035,41.641 ccw(c65.252,41.425) v1@64.945,41.425 ; U3.L11@65.195,41.925 cw(c64.898,41.925) 65.108,41.715 cw(c65.318,41.505) U3.L11@65.318,41.802
  Mid-Layer 1 w0.127: v1@64.818,41.234 cw(c64.818,40.774) 65.143,41.099 cw(c65.468,41.425) v1@65.008,41.425 ; v1(64.818,41.425) 65.329,40.914 65.329,20.066 72.644,12.751 ; 72.11,13.284 cw(c71.282,12.456) v1@72.453,12.456 ; 72.327,13.068 cw(c71.716,12.456) v1@72.581,12.456 ; 72.544,12.851 cw(c72.15,12.456) v1@72.707,12.456 ; v1@72.566,12.63 ccw(c72.511,12.751) 72.644,12.751 ; v1(72.644,12.456) 72.644,12.751 ; v1@72.722,12.63 cw(c72.777,12.751) 72.644,12.751
S_DB7: U3.K12 U9.13 | length 37.8
  Top Layer w0.152: v1@74.118,12.32 cw(c73.818,12.02) U9.13@74.243,12.02 ; U9.13@74.144,11.935 ccw(c73.906,12.174) 74.243,12.174 ccw(c74.58,12.174) U9.13@74.342,11.935 ; U9.13@74.243,11.1 v1(74.244,12.446) v1(74.244,12.446) ; U9.13@74.243,12.014 cw(c74.676,12.014) v1@74.37,12.32
  Top Layer w0.254: v1(65.818,40.425) U3.K12@66.318,40.925 ; v1@65.818,40.552 ccw(c65.818,40.858) 66.035,40.641 ccw(c66.252,40.425) v1@65.945,40.425 ; U3.K12@66.195,40.925 cw(c65.898,40.925) 66.108,40.715 cw(c66.318,40.505) U3.K12@66.318,40.802
  Mid-Layer 1 w0.127: v1@65.818,40.234 cw(c65.818,39.774) 66.143,40.099 cw(c66.468,40.425) v1@66.008,40.425 ; v1(65.818,40.425) 66.294,39.949 66.294,21.92 74.244,13.97 74.244,13.386 cw(c74.117,13.386) 74.117,13.259 73.887,13.259 ccw(c73.887,13.132) 73.76,13.132 ccw(c73.887,13.132) 73.887,13.005 74.117,13.005 cw(c74.117,12.878) 74.244,12.878 ; v1@74.116,12.587 ccw(c73.85,12.878) 74.244,12.878 ; v1(74.244,12.446) 74.244,12.878 ; v1@74.373,12.587 cw(c74.638,12.878) 74.244,12.878
S_DB8: U3.G16 U9.42 | length 35.6
  Top Layer w0.127: U3.G16@69.186,36.793 cw(c68.868,36.474) 69.318,36.474 cw(c69.768,36.474) U3.G16@69.45,36.793 ; U3.G16@69.318,36.925 69.318,34.492 70.04,33.769 ccw(c70.13,33.859) 70.22,33.769 70.393,33.942 cw(c70.483,33.852) 70.572,33.942 cw(c70.483,33.852) 70.572,33.762 70.048,33.237 ccw(c70.137,33.148) 70.048,33.058 ccw(c70.137,33.148) 70.227,33.058 70.752,33.583 cw(c70.842,33.493) 70.932,33.583 cw(c70.842,33.493) 70.932,33.403 70.407,32.878 ccw(c70.497,32.788) 70.407,32.699 ccw(c70.497,32.788) 70.586,32.699 71.111,33.223 cw(c71.201,33.134) 71.291,33.223 cw(c71.201,33.134) 71.291,33.044 70.766,32.519 ccw(c70.856,32.429) 70.766,32.339 ccw(c70.856,32.429) 70.946,32.339 71.47,32.864 cw(c71.56,32.774) 71.65,32.864 cw(c71.56,32.774) 71.65,32.685 71.125,32.16 ccw(c71.215,32.07) 71.125,31.98 ccw(c71.215,32.07) 71.305,31.98 71.83,32.505 cw(c71.919,32.415) 72.009,32.505 cw(c71.919,32.415) 72.009,32.325 71.484,31.801 ccw(c71.574,31.711) 71.484,31.621 ccw(c71.574,31.711) 71.664,31.621 72.037,31.994 cw(c72.127,31.904) 72.217,31.994 cw(c72.127,31.904) 72.217,31.815 71.844,31.441 ccw(c71.933,31.352) 71.844,31.262 ccw(c71.933,31.352) 72.023,31.262 72.548,31.787 cw(c72.638,31.697) 72.728,31.787 cw(c72.638,31.697) 72.728,31.607 72.203,31.082 ccw(c72.293,30.992) 72.203,30.903 ccw(c72.293,30.992) 72.382,30.903 72.907,31.427 cw(c72.997,31.338) 73.087,31.427 cw(c72.997,31.338) 73.087,31.248 72.824,30.985 72.562,30.723 ccw(c72.652,30.633) 72.562,30.543 ccw(c72.652,30.633) 72.742,30.543 73.266,31.068 cw(c73.356,30.978) 73.446,31.068 cw(c73.356,30.978) 73.446,30.889 72.921,30.364 ccw(c73.011,30.274) 72.921,30.184 ccw(c73.011,30.274) 73.101,30.184 73.626,30.709 cw(c73.715,30.619) 73.805,30.709 cw(c73.715,30.619) 73.805,30.529 73.28,30.005 ccw(c73.37,29.915) 73.28,29.825 ccw(c73.37,29.915) 73.46,29.825 73.985,30.35 cw(c74.075,30.26) 74.164,30.35 cw(c74.075,30.26) 74.164,30.17 73.992,29.998 ccw(c74.082,29.908) 73.992,29.818 74.243,29.567 U9.42@74.243,22.784 ; U9.42@74.135,23.628 ccw(c73.875,23.888) 74.243,23.888 ccw(c74.611,23.888) U9.42@74.351,23.628
S_DB9: U3.J11 U9.44 | length 35.6
  Top Layer w0.127: U3.J11@67.318,41.738 cw(c67.318,41.288) 67.636,41.606 cw(c67.955,41.925) U3.J11@67.505,41.925 ; U3.J11@67.318,41.925 67.843,41.399 67.843,34.442 68.135,34.15 ccw(c68.225,34.24) 68.315,34.15 68.492,34.327 cw(c68.582,34.237) 68.671,34.327 cw(c68.582,34.237) 68.671,34.147 68.138,33.614 ccw(c68.228,33.525) 68.138,33.435 ccw(c68.228,33.525) 68.318,33.435 68.851,33.968 cw(c68.941,33.878) 69.031,33.968 cw(c68.941,33.878) 69.031,33.788 68.498,33.255 ccw(c68.588,33.165) 68.498,33.076 ccw(c68.588,33.165) 68.677,33.076 69.21,33.608 cw(c69.3,33.519) 69.39,33.608 cw(c69.3,33.519) 69.39,33.429 68.857,32.896 ccw(c68.947,32.806) 68.857,32.716 ccw(c68.947,32.806) 69.037,32.716 69.303,32.983 69.537,33.217 cw(c69.627,33.127) 69.716,33.217 cw(c69.627,33.127) 69.716,33.037 69.216,32.537 ccw(c69.306,32.447) 69.216,32.357 ccw(c69.306,32.447) 69.396,32.357 69.662,32.624 69.818,32.78 cw(c69.908,32.69) 69.998,32.78 cw(c69.908,32.69) 69.998,32.6 69.842,32.444 69.575,32.178 ccw(c69.665,32.088) 69.575,31.998 ccw(c69.665,32.088) 69.755,31.998 70.021,32.264 70.177,32.421 cw(c70.267,32.331) 70.357,32.421 cw(c70.267,32.331) 70.357,32.241 70.201,32.085 69.935,31.818 ccw(c70.024,31.729) 69.935,31.639 ccw(c70.024,31.729) 70.114,31.639 70.381,31.905 70.537,32.061 cw(c70.626,31.972) 70.716,32.061 cw(c70.626,31.972) 70.716,31.882 70.56,31.726 70.294,31.459 ccw(c70.384,31.369) 70.294,31.28 ccw(c70.384,31.369) 70.473,31.28 70.74,31.546 70.896,31.702 cw(c70.986,31.612) 71.075,31.702 cw(c70.986,31.612) 71.075,31.522 70.919,31.366 70.653,31.1 ccw(c70.743,31.01) 70.653,30.92 ccw(c70.743,31.01) 70.833,30.92 71.009,31.097 cw(c71.099,31.007) 71.189,31.097 72.644,29.642 U9.44@72.644,22.784 ; U9.44@72.536,23.628 ccw(c72.276,23.888) 72.644,23.888 ccw(c73.012,23.888) U9.44@72.752,23.628
S_DB10: U3.J16 U9.45 | length 35.6
  Top Layer w0.127: U3.J16@67.186,36.793 cw(c66.887,36.494) 67.31,36.494 ; 67.31,36.455 cw(c67.788,36.455) U3.J16@67.45,36.793 ; U3.J16@67.31,36.932 67.31,36.925 67.31,33.858 71.125,30.044 cw(c71.035,29.954) 71.125,29.864 70.955,29.694 ccw(c71.045,29.604) 70.955,29.515 ccw(c71.045,29.604) 71.134,29.515 71.654,30.034 cw(c71.743,29.944) 71.833,30.034 cw(c71.743,29.944) 71.833,29.854 71.663,29.684 ccw(c71.753,29.595) 71.663,29.505 71.843,29.325 71.843,29.058 cw(c71.716,29.058) 71.716,28.931 71.476,28.931 ccw(c71.476,28.804) 71.349,28.804 ccw(c71.476,28.804) 71.476,28.677 72.21,28.677 cw(c72.21,28.55) 72.337,28.55 cw(c72.21,28.55) 72.21,28.423 71.476,28.423 ccw(c71.476,28.296) 71.349,28.296 ccw(c71.476,28.296) 71.476,28.169 72.21,28.169 cw(c72.21,28.042) 72.337,28.042 cw(c72.21,28.042) 72.21,27.915 71.476,27.915 ccw(c71.476,27.788) 71.349,27.788 ccw(c71.476,27.788) 71.476,27.661 72.21,27.661 cw(c72.21,27.534) 72.337,27.534 cw(c72.21,27.534) 72.21,27.407 71.476,27.407 ccw(c71.476,27.28) 71.349,27.28 ccw(c71.476,27.28) 71.476,27.153 72.21,27.153 cw(c72.21,27.026) 72.337,27.026 cw(c72.21,27.026) 72.21,26.899 71.476,26.899 ccw(c71.476,26.772) 71.349,26.772 ccw(c71.476,26.772) 71.476,26.645 72.21,26.645 cw(c72.21,26.518) 72.337,26.518 cw(c72.21,26.518) 72.21,26.391 71.476,26.391 ccw(c71.476,26.264) 71.349,26.264 ccw(c71.476,26.264) 71.476,26.137 72.21,26.137 cw(c72.21,26.01) 72.337,26.01 cw(c72.21,26.01) 72.21,25.883 71.476,25.883 ccw(c71.476,25.756) 71.349,25.756 ccw(c71.476,25.756) 71.476,25.629 72.21,25.629 cw(c72.21,25.502) 72.337,25.502 cw(c72.21,25.502) 72.21,25.375 71.476,25.375 ccw(c71.476,25.248) 71.349,25.248 ccw(c71.476,25.248) 71.476,25.121 72.21,25.121 cw(c72.21,24.994) 72.337,24.994 cw(c72.21,24.994) 72.21,24.867 71.476,24.867 ccw(c71.476,24.74) 71.349,24.74 ccw(c71.476,24.74) 71.476,24.613 72.21,24.613 cw(c72.21,24.486) 72.337,24.486 cw(c72.21,24.486) 72.21,24.359 71.476,24.359 ccw(c71.476,24.232) 71.349,24.232 ccw(c71.476,24.232) 71.476,24.105 71.716,24.105 cw(c71.716,23.978) 71.843,23.978 U9.45@71.843,22.784 ; U9.45@71.735,23.628 ccw(c71.475,23.888) 71.843,23.888 ccw(c72.211,23.888) U9.45@71.951,23.628
S_DB11: U3.J15 U9.47 | length 35.6
  Top Layer w0.127: U3.J15@67.132,37.925 cw(c66.681,37.925) 67,37.606 cw(c67.318,37.288) U3.J15@67.318,37.738 ; U3.J15@67.318,37.925 66.827,37.434 66.827,33.401 70.243,29.985 70.243,29.337 ccw(c70.37,29.337) 70.37,29.21 70.611,29.21 cw(c70.611,29.083) 70.738,29.083 cw(c70.611,29.083) 70.611,28.956 69.875,28.956 ccw(c69.875,28.829) 69.748,28.829 ccw(c69.875,28.829) 69.875,28.702 70.611,28.702 cw(c70.611,28.575) 70.738,28.575 cw(c70.611,28.575) 70.611,28.448 69.875,28.448 ccw(c69.875,28.321) 69.748,28.321 ccw(c69.875,28.321) 69.875,28.194 70.611,28.194 cw(c70.611,28.067) 70.738,28.067 cw(c70.611,28.067) 70.611,27.94 69.875,27.94 ccw(c69.875,27.813) 69.748,27.813 ccw(c69.875,27.813) 69.875,27.686 70.611,27.686 cw(c70.611,27.559) 70.738,27.559 cw(c70.611,27.559) 70.611,27.432 69.875,27.432 ccw(c69.875,27.305) 69.748,27.305 ccw(c69.875,27.305) 69.875,27.178 70.611,27.178 cw(c70.611,27.051) 70.738,27.051 cw(c70.611,27.051) 70.611,26.924 69.875,26.924 ccw(c69.875,26.797) 69.748,26.797 ccw(c69.875,26.797) 69.875,26.67 70.611,26.67 cw(c70.611,26.543) 70.738,26.543 cw(c70.611,26.543) 70.611,26.416 69.875,26.416 ccw(c69.875,26.289) 69.748,26.289 ccw(c69.875,26.289) 69.875,26.162 70.611,26.162 cw(c70.611,26.035) 70.738,26.035 cw(c70.611,26.035) 70.611,25.908 69.875,25.908 ccw(c69.875,25.781) 69.748,25.781 ccw(c69.875,25.781) 69.875,25.654 70.611,25.654 cw(c70.611,25.527) 70.738,25.527 cw(c70.611,25.527) 70.611,25.4 69.875,25.4 ccw(c69.875,25.273) 69.748,25.273 ccw(c69.875,25.273) 69.875,25.146 70.611,25.146 cw(c70.611,25.019) 70.738,25.019 cw(c70.611,25.019) 70.611,24.892 69.875,24.892 ccw(c69.875,24.765) 69.748,24.765 ccw(c69.875,24.765) 69.875,24.638 70.611,24.638 cw(c70.611,24.511) 70.738,24.511 cw(c70.611,24.511) 70.611,24.384 69.875,24.384 ccw(c69.875,24.257) 69.748,24.257 ccw(c69.875,24.257) 69.875,24.13 70.116,24.13 cw(c70.116,24.003) 70.243,24.003 U9.47@70.243,22.784 ; U9.47@70.135,23.628 ccw(c69.875,23.888) 70.243,23.888 ccw(c70.611,23.888) U9.47@70.351,23.628
S_DB12: U3.K16 U9.48 | length 35.6
  Top Layer w0.127: U3.K16@66.186,36.793 cw(c65.868,36.474) 66.318,36.474 cw(c66.768,36.474) U3.K16@66.45,36.793 ; U3.K16@66.318,36.925 66.318,34.723 ccw(c66.445,34.723) 66.445,34.596 cw(c66.445,34.469) 66.572,34.469 cw(c66.445,34.469) 66.445,34.342 ccw(c66.445,34.215) 66.318,34.215 ccw(c66.445,34.215) 66.445,34.088 cw(c66.445,33.961) 66.572,33.961 cw(c66.445,33.961) 66.445,33.834 66.18,33.834 ccw(c66.18,33.707) 66.053,33.707 ccw(c66.18,33.707) 66.18,33.58 66.445,33.58 cw(c66.445,33.453) 66.572,33.453 cw(c66.445,33.453) 66.445,33.326 66.18,33.326 ccw(c66.18,33.199) 66.053,33.199 ccw(c66.18,33.199) 66.18,33.072 66.696,33.072 cw(c66.696,32.945) 66.823,32.945 cw(c66.696,32.945) 66.696,32.818 66.18,32.818 ccw(c66.18,32.691) 66.053,32.691 ccw(c66.18,32.691) 66.18,32.564 66.696,32.564 cw(c66.696,32.437) 66.823,32.437 cw(c66.696,32.437) 66.696,32.31 66.445,32.31 ccw(c66.445,32.183) 66.318,32.183 66.318,31.929 66.569,31.678 cw(c66.48,31.588) 66.569,31.498 66.392,31.321 ccw(c66.482,31.231) 66.392,31.141 ccw(c66.482,31.231) 66.572,31.141 67.106,31.676 cw(c67.196,31.586) 67.285,31.676 cw(c67.196,31.586) 67.285,31.496 66.751,30.962 ccw(c66.841,30.872) 66.751,30.782 ccw(c66.841,30.872) 66.931,30.782 67.465,31.316 cw(c67.555,31.227) 67.645,31.316 cw(c67.555,31.227) 67.645,31.137 67.11,30.603 ccw(c67.2,30.513) 67.11,30.423 ccw(c67.2,30.513) 67.29,30.423 67.824,30.957 cw(c67.914,30.867) 68.004,30.957 cw(c67.914,30.867) 68.004,30.778 67.47,30.243 ccw(c67.559,30.154) 67.47,30.064 ccw(c67.559,30.154) 67.649,30.064 68.183,30.598 cw(c68.273,30.508) 68.363,30.598 cw(c68.273,30.508) 68.363,30.418 67.829,29.884 ccw(c67.919,29.794) 67.829,29.705 ccw(c67.919,29.794) 68.008,29.705 68.543,30.239 cw(c68.632,30.149) 68.722,30.239 cw(c68.632,30.149) 68.722,30.059 68.188,29.525 ccw(c68.278,29.435) 68.188,29.345 ccw(c68.278,29.435) 68.368,29.345 68.902,29.88 cw(c68.992,29.79) 69.081,29.88 cw(c68.992,29.79) 69.081,29.7 68.547,29.166 ccw(c68.637,29.076) 68.547,28.986 ccw(c68.637,29.076) 68.727,28.986 69.261,29.52 cw(c69.351,29.431) 69.441,29.52 cw(c69.351,29.431) 69.441,29.341 69.263,29.163 ccw(c69.353,29.074) 69.263,28.984 69.443,28.804 69.443,28.499 cw(c69.316,28.499) 69.316,28.372 69.065,28.372 ccw(c69.065,28.245) 68.938,28.245 ccw(c69.065,28.245) 69.065,28.118 69.316,28.118 cw(c69.316,27.991) 69.443,27.991 cw(c69.316,27.991) 69.316,27.864 69.065,27.864 ccw(c69.065,27.737) 68.938,27.737 ccw(c69.065,27.737) 69.065,27.61 69.316,27.61 cw(c69.316,27.483) 69.443,27.483 cw(c69.316,27.483) 69.316,27.356 69.263,27.356 ccw(c69.263,27.229) 69.136,27.229 ccw(c69.263,27.229) 69.263,27.102 69.316,27.102 cw(c69.316,26.975) 69.443,26.975 cw(c69.316,26.975) 69.316,26.848 69.302,26.848 ccw(c69.302,26.721) 69.175,26.721 ccw(c69.302,26.721) 69.302,26.594 69.316,26.594 cw(c69.316,26.467) 69.443,26.467 U9.48@69.443,22.784 ; U9.48@69.335,23.628 ccw(c69.075,23.888) 69.443,23.888 ccw(c69.811,23.888) U9.48@69.551,23.628